# Altium PCB linkit-v4-0.3_6layers_smdonly.PcbDoc (part 3 of 5)
Units mm, origin at the board's own origin, x right, y up, seen from the top; angles counter-clockwise.
Board outline 70 x 35 mm, 6 copper layers (Top Layer, Int1 (GND), Int2 (Sign), Int3 (Sign), Int4 (PWR), Bottom Layer), stack 1.636 mm thick; 199 components, 156 nets, 686 pads, 897 vias.
Unrouted connection lines stored in the file: 1.
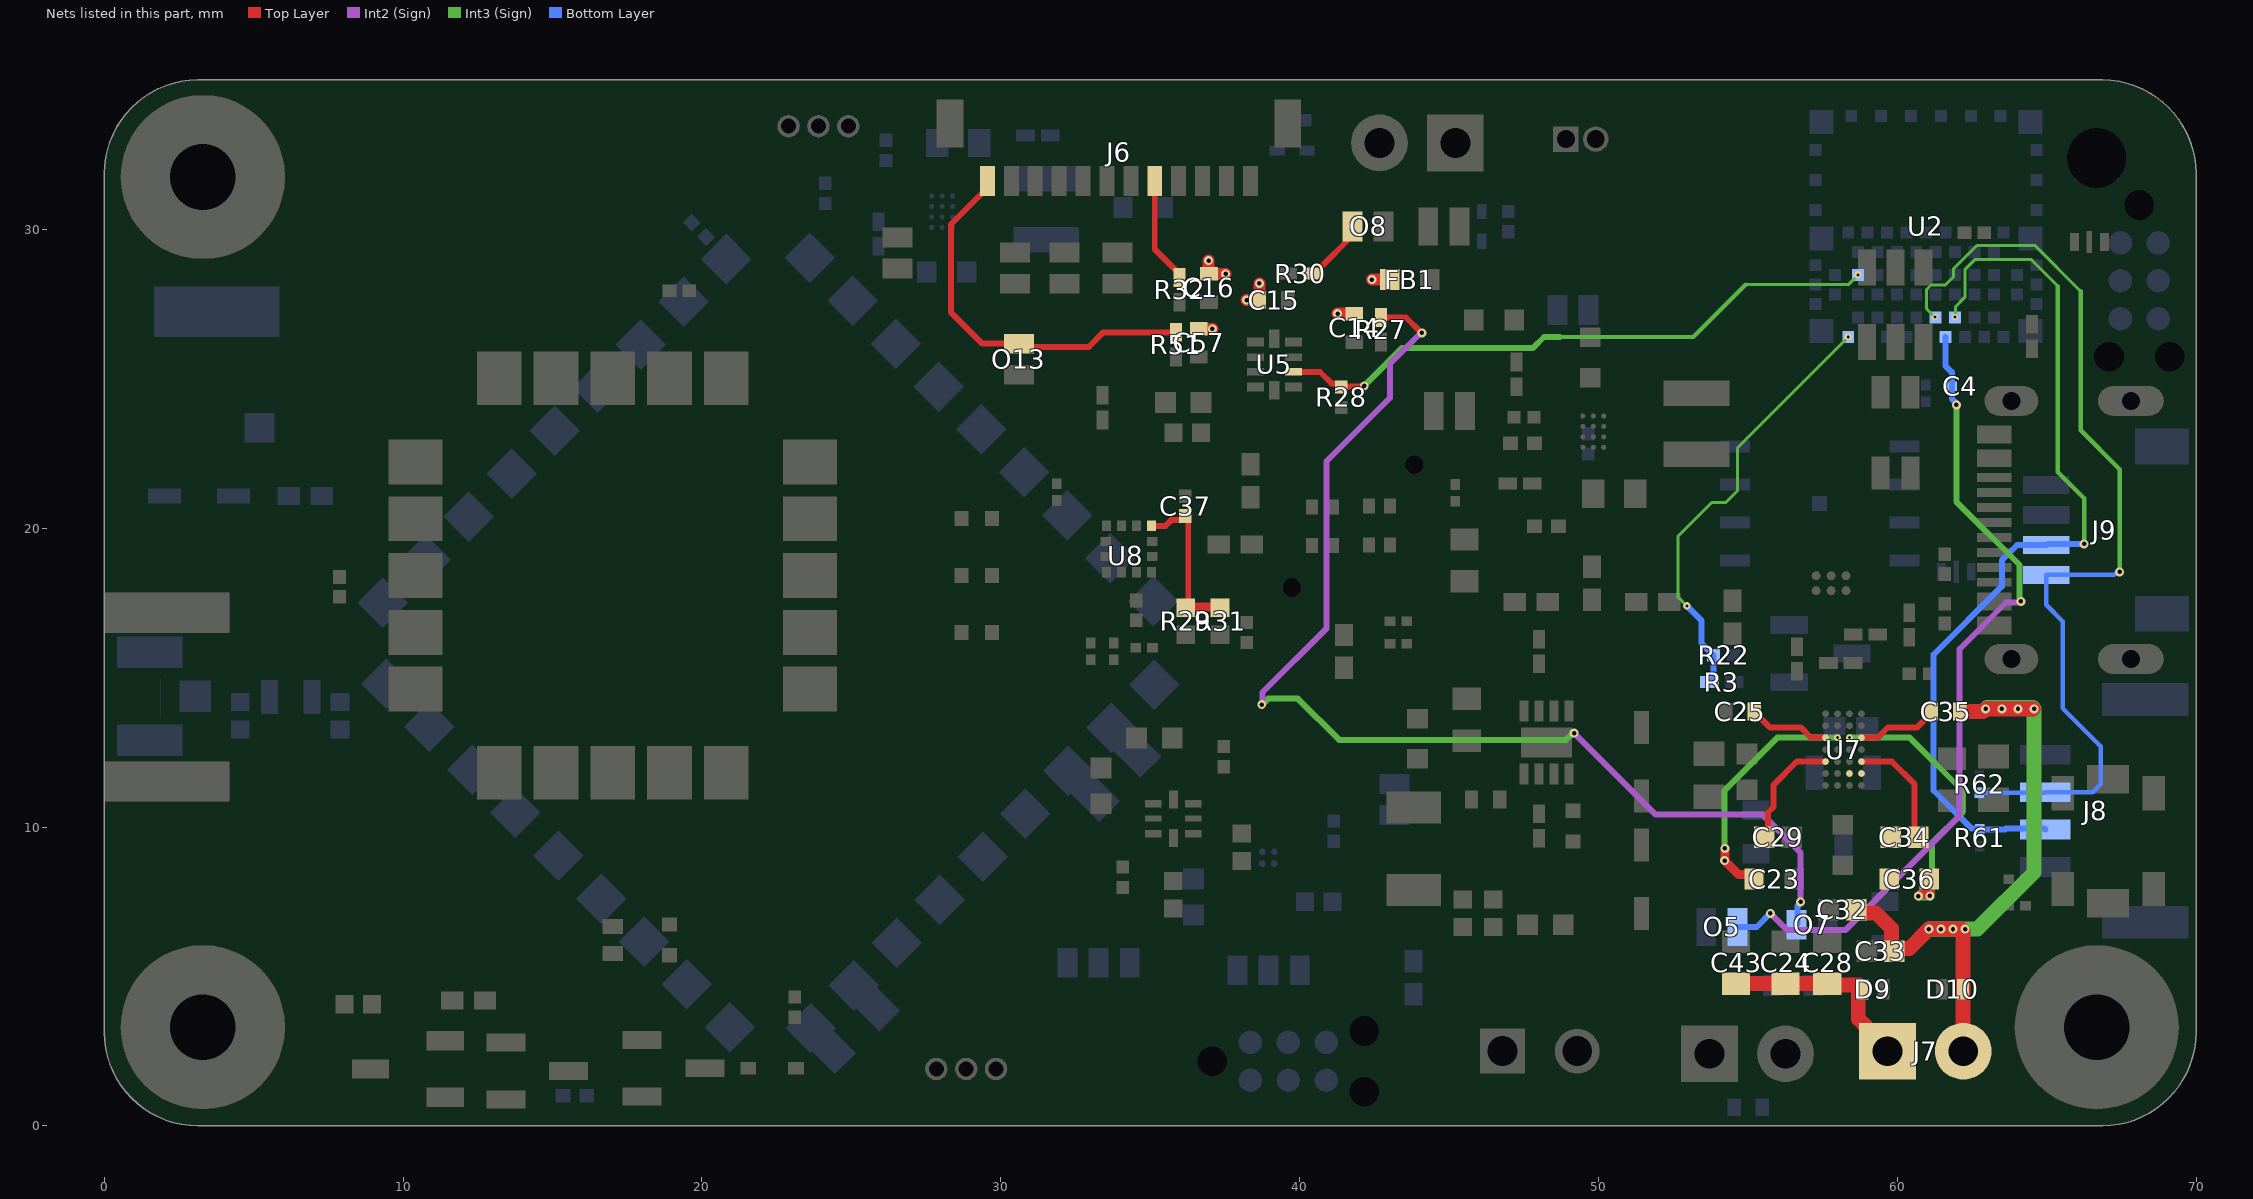
[diagram p6: the nets of this part, all layers, seen from the top]

## Part data (continued)
R18 R19 R20 R21 R22 R28 R57 R59 R60 R66 R67: "Thick Film Resistors - SMD 1 MOhms 50 mW 0201 1%", Manufacturer_Name=KEMET, Mouser Part Number=603-RC0201FR-7D1ML, Arrow Part Number=RC0201FR-7D1ML, Arrow Price/Stock=https://www.arrow.com/en/products/rc0201fr-7d1ml/yageo, Datasheet Link=http://www.yageo.com/documents/recent/PYu-RC0201_51_RoHS_L_8.pdf, Height=0.26mm, Manufacturer_Part_Number=RC0201FR-7D1ML, Mouser Price/Stock=https://www.mouser.co.uk/ProductDetail/YAGEO/RC0201FR-7D1ML?qs=NgbZBzc1CyEo5FlGf5N0Ug%3D%3D
R23: library part "RES 750R 0201 1% 100PPM", "RES 750R 0201 1% 100PPM", Supplier Part Number 1=71-CRCW0201750RFKED, TOLERANCE=1%, PPM=100, Size=0201, Supplier 1=Mouser, Supplier 2=Digi-Key, Supplier Part Number 2=541-750AABCT-ND
R24: library part "RES 330R 0201 1% 100PPM", "RES 330R 0201 1% 100PPM", Supplier Part Number 1=71-CRCW0201330RFKED, TOLERANCE=1%, PPM=100, Size=0201, Supplier 1=Mouser, Supplier 2=Digi-Key, Supplier Part Number 2=541-330AABCT-ND
R25: library part "RES 1.6K 0201 1% 100PPM", "RES 1.6K 0201 1% 100PPM", Supplier Part Number 1=71-CRCW02011K60FKED, TOLERANCE=1%, PPM=100, Size=0201, Supplier 1=Mouser, Supplier 2=Digi-Key, Supplier Part Number 2=541-1.60KAABCT-ND
R26: library part RES-NC-0402, "Generic Resistor, Not Fitted", Manufacturer=YAGEO, Manufacturer_Part_Number=RC0402JR-070RL, Package=R0402, ComponentLink1Description=Datasheet, ComponentLink1URL=http://tunmcdsvn.tun.st.com/Component_Datasheet_Library/Trunk/Resistors/Yageo_Resistor_RC0402-series, Initial_Board_Reference=MB1274, Internal_Part_Number=MCD-00052, part_type=Resistor, Provided_By=SUBCO, status=Released
R31: library part "RES 0R 0402", "RES 0R 0402", Supplier Part Number 1=603-RC0402JR-070RL, Size=0402, Supplier 1=Mouser, Supplier 2=Digi-Key, Supplier Part Number 2=311-0.0JRCT-ND
R33 R34: "Thick Film Resistors - SMD 1/20watt 5.1Kohms 5% 200ppm", Manufacturer_Name=Vishay, Mouser Part Number=71-CRCW02015K10JNED, Datasheet Link=http://www.vishay.com/docs/20035/dcrcwe3.pdf, Height=0.28mm, Manufacturer_Part_Number=CRCW02015K10JNED, Mouser Price/Stock=https://www.mouser.com/Search/Refine.aspx?Keyword=71-CRCW02015K10JNED
R35: library part CRCW04020000Z0EEHP, "Thick Film Resistors - SMD CRCW 402 jumper", Manufacturer_Name=Vishay, Mouser Part Number=71-CRCW04020000Z0EEH, Arrow Part Number=CRCW04020000Z0EEHP, Arrow Price/Stock=https://www.arrow.com/en/products/crcw04020000z0eehp/vishay?utm_currency=USD&region=nac, Datasheet Link=http://www.vishay.com/docs/20035/dcrcwe3.pdf, Height=0.4mm, Manufacturer_Part_Number=CRCW04020000Z0EEHP, Mouser Price/Stock=https://www.mouser.co.uk/ProductDetail/Vishay-Dale/CRCW04020000Z0EEHP?qs=Imq1NPwxi74NTc567q7flQ%3D%3D
R36: "Res Thick Film 0201 453 Ohm 1% 1/20W ±100ppm/°C Molded SMD SMD Paper T/R", Case Code (Imperial)=0201, Case Code (Metric)=0603, Manufacturer="Vishay Dale", Manufacturer Part Number=CRCW0201453RFKED, Manufacturer_Name=Vishay, Max Operating Temperature=155°C, Max Power Dissipation=50mW, Min Operating Temperature=-55°C, Mouser Part Number=71-CRCW020120K0FKED, Package Quantity=10000, Supplier Part Number=71-CRCW0201453RFKED, Temperature Coefficient=100ppm/°C, TOLERANCE=1%, Voltage Rating=30V, Arrow Part Number=CRCW020120K0FKED, Arrow Price/Stock=https://www.arrow.com/en/products/crcw020120k0fked/vishay, Case/Package=0201, Category="Chip SMD Resistors", ComponentLink1Description=https://datasheet.ciiva.com/8935/crcw0201e3-8935846.pdf?src-supplier=Avnet, ComponentLink1URL=https://datasheet.ciiva.com/8935/crcw0201e3-8935846.pdf?src-supplier=Avnet, ComponentLink2Description=https://datasheet.ciiva.com/2580/crcw0201e3-2580478.pdf?src-supplier=Digikey, ComponentLink2URL=https://datasheet.ciiva.com/2580/crcw0201e3-2580478.pdf?src-supplier=Digikey, Contact Plating=Tin, Datasheet Link=http://www.vishay.com/docs/20035/dcrcwe3.pdf, Height=0.28mm, Lead Free="Lead Free", Length=0.024inch, Manufacturer_Part_Number=CRCW020120K0FKED, Mouser Price/Stock=https://www.mouser.co.uk/ProductDetail/Vishay-Dale/CRCW020120K0FKED?qs=1%252BOKmYoxJmkUY7PW7c9G2g%3D%3D, Number of Terminations=2, Packaging="Tape and Reel", Power Rating=50mW, Pricing="1=0,21, 10=0,091, 50=0,091, 100=0,063, 1000=0,043, 10000=0,029 (USD)", Radiation Hardening=No, RoHS=Yes, RoHS Compliant=Yes, Series=CRCW, Stock=8250, SUPPLIER=Mouser, Termination=SMD/SMT, Voltage Rating (DC)=30V, Weight=6E-06oz, Width=0.3mm
R37: "Thick Film Resistors - SMD 10 kOhms 50 mW 0201 1%", Manufacturer_Name=KEMET, Mouser Part Number=603-RC0201FR-7D10KL, Datasheet Link=http://www.yageo.com/documents/recent/PYu-RC0201_51_RoHS_L_8.pdf, Height=0.26mm, Manufacturer_Part_Number=RC0201FR-7D10KL, Mouser Price/Stock=https://www.mouser.co.uk/ProductDetail/YAGEO/RC0201FR-7D10KL?qs=F5EMLAvA7ICAEt2%2Fo%2FBSlA%3D%3D
R38: "Thick Film Resistors - SMD 0201 255ohm 1% HalogenFree AEC-Q200", Manufacturer_Name=Panasonic, Datasheet Link=https://industrial.panasonic.com/cdbs/www-data/pdf/RDA0000/AOA0000C301.pdf, Height=0.26mm, Manufacturer_Part_Number=ERJ-1GNF2550C
R39: "Thick Film Resistors - SMD 1/20watt 196ohms 1% 100ppm"
R40 R42: "Thick Film Resistors - SMD 1/20watt 470ohms 1% 200ppm", Manufacturer_Name=Panasonic, Mouser Part Number=667-ERJ-U02F4700X, Datasheet Link=https://industrial.panasonic.com/cdbs/www-data/pdf/RDP0000/AOA0000C334.pdf, Height=0.4mm, Manufacturer_Part_Number=ERJ-U02F4700X, Mouser Price/Stock=https://www.mouser.co.uk/ProductDetail/Panasonic/ERJ-U02F4700X?qs=CBysBIMljtjEviQOZxHkmQ%3D%3D
R41: "Thick Film Resistors - SMD 1/16watt 3.3Kohms 1% 100ppm", Manufacturer_Name=Vishay, Mouser Part Number=71-CRCW0402-3.3K-E3, Arrow Part Number=CRCW04023K30FKED, Arrow Price/Stock=https://www.arrow.com/en/products/crcw04023k30fked/vishay, Datasheet Link=http://www.vishay.com/docs/20035/dcrcwe3.pdf, Height=0.4mm, Manufacturer_Part_Number=CRCW04023K30FKED, Mouser Price/Stock=https://www.mouser.co.uk/ProductDetail/Vishay-Dale/CRCW04023K30FKED?qs=iv%252Be0Bc5VY2uvlCcTQHBWQ%3D%3D
R43 R44: "Thick Film Resistors - SMD 1/20watt 22ohms 1% 200ppm", Manufacturer_Name=Panasonic, Datasheet Link=https://industrial.panasonic.com/cdbs/www-data/pdf/RDP0000/AOA0000C334.pdf, Height=0.4mm, Manufacturer_Part_Number=ERJ-U02F22R0X
R45 R68: "Thick Film Resistors - SMD 36.5Kohm 1% 200ppm", Manufacturer_Name=Vishay, Datasheet Link=http://www.vishay.com/docs/20035/dcrcwe3.pdf, Height=0.28mm, Manufacturer_Part_Number=CRCW020136K5FNED
R46 R69: "Thick Film Resistors - SMD 0 Ohms 50mW 0201 1%", Manufacturer_Name=KEMET, Mouser Part Number=603-RC0201FR-070RL, Arrow Part Number=RC0201FR-070RL, Arrow Price/Stock=https://www.arrow.com/en/products/rc0201fr-070rl/yageo?region=nac, Datasheet Link=http://www.yageo.com/documents/recent/PYu-RC0201_51_RoHS_L_8.pdf, Height=0.26mm, Manufacturer_Part_Number=RC0201FR-070RL, Mouser Price/Stock=https://www.mouser.co.uk/ProductDetail/YAGEO/RC0201FR-070RL?qs=LWWr1WFOkdETHfAClQk8Xg%3D%3D
R47 R70: "Thick Film Resistors - SMD 1/20W 2.74Kohms 1% 200ppm", Manufacturer_Name=Vishay, Datasheet Link=http://www.vishay.com/docs/20035/dcrcwe3.pdf, Height=0.28mm, Manufacturer_Part_Number=CRCW02012K74FNED
R49: "Thick Film Resistors - SMD 1/16watt 49.9Kohms 1%", Manufacturer_Name=Vishay, Mouser Part Number=71-CRCW0402-49.9K-E3, Arrow Part Number=CRCW040249K9FKED, Arrow Price/Stock=https://www.arrow.com/en/products/crcw040249k9fked/vishay?region=nac, Datasheet Link=http://www.vishay.com/docs/20035/dcrcwe3.pdf, Height=0.4mm, Manufacturer_Part_Number=CRCW040249K9FKED, Mouser Price/Stock=https://www.mouser.co.uk/ProductDetail/Vishay-Dale/CRCW040249K9FKED?qs=hAuyw6LW%252BLhwjtjsHx%2FGDQ%3D%3D
R52 R53 R55: "Thick Film Resistors - SMD CRCW 402 jumper", Manufacturer_Name=Vishay, Mouser Part Number=71-CRCW04020000Z0EEH, Arrow Part Number=CRCW04020000Z0EEHP, Arrow Price/Stock=https://www.arrow.com/en/products/crcw04020000z0eehp/vishay?utm_currency=USD&region=nac, Datasheet Link=http://www.vishay.com/docs/20035/dcrcwe3.pdf, Height=0.4mm, Manufacturer_Part_Number=CRCW04020000Z0EEHP, Mouser Price/Stock=https://www.mouser.co.uk/ProductDetail/Vishay-Dale/CRCW04020000Z0EEHP?qs=Imq1NPwxi74NTc567q7flQ%3D%3D
R58: "Thick Film Resistors - SMD 10 MOhms 50mW 0201 1%", Manufacturer_Name=KEMET, Mouser Part Number=603-RC0201FR-0710ML, Arrow Part Number=RC0201FR-0710ML, Arrow Price/Stock=https://www.arrow.com/en/products/rc0201fr-0710ml/yageo, Datasheet Link=http://www.yageo.com/documents/recent/PYu-RC0201_51_RoHS_L_8.pdf, Height=0.26mm, Manufacturer_Part_Number=RC0201FR-0710ML, Mouser Price/Stock=https://www.mouser.com/Search/Refine.aspx?Keyword=603-RC0201FR-0710ML
R63: "Thick Film Resistors - SMD 1/20watt 100Kohms 5% 200ppm", Manufacturer_Name=Vishay, Mouser Part Number=71-CRCW0201100KJNED, Arrow Part Number=CRCW0201100KJNED, Arrow Price/Stock=https://www.arrow.com/en/products/crcw0201100kjned/vishay, Datasheet Link=http://www.vishay.com/docs/20035/dcrcwe3.pdf, Height=0.28mm, Manufacturer_Part_Number=CRCW0201100KJNED, Mouser Price/Stock=https://www.mouser.co.uk/ProductDetail/Vishay-Dale/CRCW0201100KJNED?qs=IQLUlsvFoXu8A8gHIw6owA%3D%3D
R65: library part CRCW04020000Z0ED, "Thick Film Resistors  - SMD 0402 0.063 W 0 Ohm Jumper", Case Code (Imperial)=0402, Case Code (Metric)=1005, Manufacturer 1=Vishay, Max Operating Temperature=155°C, Max Power Dissipation=63mW, Min Operating Temperature=-55°C, Package Quantity=10000, Ratings=AEC-Q200, Resistance=0mR, Resistor Type="Thick Film", Supplier Part Number 1=541-0.0JCT-ND, Temperature Coefficient=100ppm/°C, TOLERANCE=5%, Voltage Rating=50V, Case/Package=0402, Category 1="Chip SMD Resistors", ComponentLink1Description=https://datasheet.ciiva.com/3255/dcrcwe3-3255944.pdf?src-supplier=Avnet, ComponentLink1URL=https://datasheet.ciiva.com/3255/dcrcwe3-3255944.pdf?src-supplier=Avnet, ComponentLink2Description=https://datasheet.ciiva.com/3255/dcrcwe3-3255945.pdf?src-supplier=Avnet, ComponentLink2URL=https://datasheet.ciiva.com/3255/dcrcwe3-3255945.pdf?src-supplier=Avnet, ComponentLink3Description=https://datasheet.ciiva.com/2461/dcrcwe3-2461962.pdf?src-supplier=Digi-Key, ComponentLink3URL=https://datasheet.ciiva.com/2461/dcrcwe3-2461962.pdf?src-supplier=Digi-Key, ComponentLink4Description=https://datasheet.ciiva.com/7841/1720486-7841802.pdf?src-supplier=Element14, ComponentLink4URL=https://datasheet.ciiva.com/7841/1720486-7841802.pdf?src-supplier=Element14, ComponentLink5Description=https://datasheet.ciiva.com/2461/dcrcwe3-2461964.pdf?src-supplier=Digi-Key, ComponentLink5URL=https://datasheet.ciiva.com/2461/dcrcwe3-2461964.pdf?src-supplier=Digi-Key, ComponentLink6Description=https://datasheet.ciiva.com/7841/1697337-7841468.pdf?src-supplier=Element14, ComponentLink6URL=https://datasheet.ciiva.com/7841/1697337-7841468.pdf?src-supplier=Element14, ComponentLink7Description=https://datasheet.ciiva.com/16761/70200976-16761309.pdf?src-supplier=Allied+Electronics, ComponentLink7URL=https://datasheet.ciiva.com/16761/70200976-16761309.pdf?src-supplier=Allied+Electronics, ComponentLink8Description=https://datasheet.ciiva.com/26311/fld-crcw-e3-data-en-26311550.pdf?src-supplier=Distrelec, ComponentLink8URL=https://datasheet.ciiva.com/26311/fld-crcw-e3-data-en-26311550.pdf?src-supplier=Distrelec, Construction=Rectangular, Contact Plating=Tin, Depth=0.5mm, Description 1="CRCW Series 0402 0.063 W 0 Ohm Jumper Surface Mount Thick Film Chip Resistor", Features="Automotive AEC-Q200", Height=0.35mm, Lead Free="Lead Free", Length=1mm, Manufacturer Part Number 1=CRCW04020000Z0ED, Military Standard=Not, Number of Terminations=2, Packaging="Tape and Reel", Power Rating=63mW, Pricing 1="1=0,1, 10=0,029, 25=0,0208, 50=0,016, 100=0,0118, 250=0,009, 500=0,0072, 1000=0,0053, 5000=0,0038 (USD)", Radiation Hardening=No, Reach SVHC Compliant=Unknown, RoHS 1=Yes, RoHS Compliant=Yes, Series=CRCW, Size Code=0402, Stock 1=170588, Supplier 1=Digi-Key, Termination=SMD/SMT, Voltage Rating (DC)=50V, Weight=2.3E-05oz, Width=0.5mm
SW1: "Board Mount Hall Effect/Magnetic Sensors Integrated Digital Omnipolar, TMR, High Sensitivity Magnetic Switch, SOT23 Package, Ind Temp, 2Hz", Manufacturer_Name="Allegro MicroSystems", Mouser Part Number=462-CT8132BV-IS3, Datasheet Link=https://www.mouser.fr/datasheet/2/1115/Allegro_DS_CT813x_Datasheet_GS_FINAL_R2_v2-3441103.pdf, Height=1.4mm, Manufacturer_Part_Number=CT8132BV-IS3, Mouser Price/Stock=https://www.mouser.fr/ProductDetail/Allegro-MicroSystems/CT8132BV-IS3?qs=GBLSl2Akirsc7cUAudCqXg%3D%3D
SW2: "SW SPST PB 50MA 12V SMT CK variant", Manufacturer=C&K, Manufacturers Part Number="PTS820J2xM SMTR LFS", Supplier Part Number 1=611-PTS820J25MSMTR, Distributor 1=EBV, Distributor 2="Future Electronics", Supplier 1=Mouser, Supplier 2=Digi-Key, Supplier Part Number 2=CKN10505CT-ND
TP14 TP15 TP16 TP17: library part TestPoint-compact, "Test Point, Compact, SMT", Manufacturer=Keystone, PartNumber=5016, Supplier Part Number 1=36-5016TR-ND, CNHeader=FALSE, ComponentLink1Description="Datasheet URL", ComponentLink1URL=http://www.keyelco.com/userAssets/store/files/5016.PDF, CompType="Test Point", CT=TRUE, Green_EU RoHS=Passed, Green_EU RoHS-2=Incomplete, Green_Lifecycle=Active, Green_REACh=Passed, LatestRevisionDate=26/05/2017, MountType=SMT, PackageReference=Testpoint_Keystone_Compact, Publisher="Texas Instruments", RoHS=Y, Supplier 1=Digi-Key, Supplier 2=Mouser, Supplier Part Number 2=534-5016
U1: "Battery Management 800-mA linear batter y charger for one-ce", Manufacturer_Name="Texas Instruments", Mouser Part Number=595-BQ25176MDSGR, Arrow Part Number=BQ25176MDSGR, Arrow Price/Stock=https://www.arrow.com/en/products/bq25176mdsgr/texas-instruments?region=nac, Datasheet Link=https://www.ti.com/lit/gpn/bq25176m, Height=0.8mm, Manufacturer_Part_Number=BQ25176MDSGR, Mouser Price/Stock=https://www.mouser.co.uk/ProductDetail/Texas-Instruments/BQ25176MDSGR?qs=Y0Uzf4wQF3nVhcdITj52nA%3D%3D
U2: "IC ISP Smart Bluetooth Module", Manufacturer=InsightSIP, Manufacturers Part Number=ISP1807-LR-ST, Temp Max=85, Temp Min=-40, Supplier 1=Rutronik, Supplier 2=Mouser, Supplier Part Number 1=ISP1807-LR-ST, Supplier Part Number 2=359-ISP1807-LR-ST, Supplier Unit Price 1=8.5
U3: "IC MEM SERIAL NOR FLASH QSPI 128Mb/16MB 3.6V 166MHz WSON8 6X5", Manufacturer=ISSI, Supplier Part Number 1=2901145, Temp Max=105, Temp Min=-40, Distributor 1=EBV, Distributor 2="Future Electronics", Manufacturers Part Number=IS25LP128F-JKLE, Supplier 1=Farnell, Supplier 2=Mouser, Supplier Part Number 2=870-IS25LP128FJKLETR
U4: "Power Switch ICs - Power Distribution Low Input VTG Dual L oad Switch", Manufacturer_Name="Texas Instruments", Mouser Part Number=595-TPS22960RSER, Arrow Part Number=TPS22960RSER, Arrow Price/Stock=https://www.arrow.com/en/products/tps22960rser/texas-instruments?region=nac, Datasheet Link=https://www.ti.com/lit/ds/symlink/tps22960.pdf?ts=1638681846865&ref_url=https%253A%252F%252Fwww.google.com%252F, Height=0.6mm, Manufacturer_Part_Number=TPS22960RSER, Mouser Price/Stock=https://www.mouser.co.uk/ProductDetail/Texas-Instruments/TPS22960RSER?qs=EQxOuqCyzqQpKHLEcq5RSg%3D%3D
U5: "Analog to Digital Converters - ADC 16B ADC w/ Int MUX P GA Comp Osc & Ref A", Manufacturer_Name="Texas Instruments", Mouser Part Number=595-ADS1115IRUGR, Arrow Part Number=ADS1115IRUGR, Arrow Price/Stock=https://www.arrow.com/en/products/ads1115irugr/texas-instruments?utm_currency=USD&region=nac, Datasheet Link=https://www.ti.com/lit/ds/symlink/ads1115.pdf?ts=1601235703022&ref_url=https%253A%252F%252Fwww.ti.com%252Fproduct%252FADS1115%253FkeyMatch%253DADS1115IRUGR%2526tisearch%253DSearch-EN-everything%2526usecase%253DOPN, Height=0.4mm, Manufacturer_Part_Number=ADS1115IRUGR, Mouser Price/Stock=https://www.mouser.co.uk/ProductDetail/Texas-Instruments/ADS1115IRUGR?qs=IK5e5L0zOXhqw%2F8AHSSbuA%3D%3D
U6: "ESD Suppressors / TVS Diodes High Speed Interface Protection Low Cap", Manufacturer_Name=STMicroelectronics, Mouser Part Number=511-USBLC6-2SC6, Arrow Part Number=USBLC6-2SC6, Arrow Price/Stock=https://www.arrow.com/en/products/usblc6-2sc6/stmicroelectronics?utm_currency=USD&region=europe, Datasheet Link=http://www.st.com/st-web-ui/static/active/en/resource/technical/document/datasheet/CD00050750.pdf, Height=1.45mm, Manufacturer_Part_Number=USBLC6-2SC6, Mouser Price/Stock=https://www.mouser.co.uk/ProductDetail/STMicroelectronics/USBLC6-2SC6?qs=po45yt2pPpu%2FhNIlwQdTlg%3D%3D
U7: "Wireless Charging ICs Wireless Pwr Receivr A 595-BQ51003YFPR", Manufacturer_Name="Texas Instruments", Mouser Part Number=595-BQ51003YFPT, Arrow Part Number=BQ51003YFPT, Arrow Price/Stock=https://www.arrow.com/en/products/bq51003yfpt/texas-instruments?region=nac, Datasheet Link=http://www.ti.com/lit/gpn/BQ51003, Height=0.5mm, Manufacturer_Part_Number=BQ51003YFPT, Mouser Price/Stock=https://www.mouser.co.uk/ProductDetail/Texas-Instruments/BQ51003YFPT?qs=QCUnHQQYO1rX6GZ4rUhwCg%3D%3D
U8: "IC AXL Accel/temp SPI/I2C 12LGA", Manufacturer="Bosch Sensortec", Supplier Part Number 1=828-1081-1-ND, Temp Max=85, Temp Min=-40, Manufacturers Part Number=BMA400, Supplier 1=Digi-Key, Supplier 2=Mouser, Supplier Part Number 2=262-BMA400
U9: "GNSS / GPS Modules u-blox M10 GNSS antenna module ROM, TCXO, SAW, LNA LGA, 16x16 mm", Manufacturer_Name=U-Blox, Mouser Part Number=377-SAM-M10Q-00B, Datasheet Link=https://content.u-blox.com/sites/default/files/documents/SAM-M10Q_DataSheet_UBX-22013293.pdf, Height=6.8mm, Manufacturer_Part_Number=SAM-M10Q-00B, Mouser Price/Stock=https://www.mouser.co.uk/ProductDetail/u-blox/SAM-M10Q-00B?qs=vvQtp7zwQdOaA6LplTUKjg%3D%3D
U10 U13: "Switching Voltage Regulators 5.5-V buck-boost con verter with 75-nA op", Manufacturer_Name="Texas Instruments", Mouser Part Number=595-TPS63901YCJR, Arrow Part Number=TPS63901YCJR, Arrow Price/Stock=https://www.arrow.com/en/products/tps63901ycjr/texas-instruments?region=nac, Datasheet Link=https://www.ti.com/lit/ds/symlink/tps63901.pdf?ts=1658737279065&ref_url=https%253A%252F%252Fwww.ti.com%252Fproduct%252FTPS63901%253FkeyMatch%253DTPS63901YCJR%2526tisearch%253Dsearch-everything%2526usecase%253DOPN, Height=0.35mm, Manufacturer_Part_Number=TPS63901YCJR, Mouser Price/Stock=https://www.mouser.co.uk/ProductDetail/Texas-Instruments/TPS63901YCJR?qs=vvQtp7zwQdNZy3FE2e2hqg%3D%3D
U11: "Power Switch ICs - Power Distribution 5.5-V 2-A 60-mohm 10-nA leakage load A 595-TPS22916CNYFPT", Manufacturer_Name="Texas Instruments", Mouser Part Number=595-TPS22916BYFPR, Arrow Part Number=TPS22916BYFPR, Arrow Price/Stock=https://www.arrow.com/en/products/tps22916byfpr/texas-instruments?region=europe, Datasheet Link=http://www.ti.com/lit/gpn/tps22916, Height=0.5mm, Manufacturer_Part_Number=TPS22916BYFPR, Mouser Price/Stock=https://www.mouser.co.uk/ProductDetail/Texas-Instruments/TPS22916BYFPR?qs=EU6FO9ffTwcHQneHYjMKrg%3D%3D
U12: "Arribada SMD module Argos comunication with PA GR5504"

## Via types
v1: diameter 0.4, hole 0.2, Int1 (GND) to Bottom Layer, tented both sides, 151 vias
v2: diameter 0.4, hole 0.2, Int1 (GND) to Int2 (Sign), tented both sides, 105 vias
v3: diameter 0.3, hole 0.15, Top Layer to Int1 (GND), tented both sides, 97 vias
v4: diameter 0.4, hole 0.2, Int1 (GND) to Int3 (Sign), tented both sides, 78 vias
v5: diameter 0.4, hole 0.2, Top Layer to Int1 (GND), tented both sides, 64 vias
v6: diameter 0.3, hole 0.15, Top Layer to Int4 (PWR), tented both sides, 63 vias
v7: diameter 0.3, hole 0.15, Top Layer to Int3 (Sign), tented both sides, 57 vias
v8: diameter 0.3, hole 0.15, Int1 (GND) to Bottom Layer, tented both sides, 50 vias
v9: diameter 0.4, hole 0.2, Top Layer to Bottom Layer, tented both sides, 40 vias
v10: diameter 0.3, hole 0.15, Int4 (PWR) to Bottom Layer, tented both sides, 17 vias
v11: diameter 0.3, hole 0.15, Int3 (Sign) to Bottom Layer, tented both sides, 17 vias
v12: diameter 0.3, hole 0.15, Top Layer to Int2 (Sign), tented both sides, 16 vias
v13: diameter 0.3, hole 0.15, Int2 (Sign) to Bottom Layer, tented both sides, 15 vias
v14: diameter 0.2, hole 0.1, Int3 (Sign) to Bottom Layer, tented both sides, 14 vias
v15: diameter 0.3, hole 0.15, Int1 (GND) to Int2 (Sign), tented both sides, 14 vias
v16: diameter 0.6, hole 0.15, Int1 (GND) to Bottom Layer, tented both sides, 13 vias
v17: diameter 0.5, hole 0.2, Top Layer to Bottom Layer, tented both sides, 12 vias
v18: diameter 0.2, hole 0.1, Int2 (Sign) to Bottom Layer, tented both sides, 11 vias
v19: diameter 0.3, hole 0.15, Int2 (Sign) to Int3 (Sign), tented both sides, 9 vias
v20: diameter 0.3, hole 0.15, Int1 (GND) to Int3 (Sign), tented both sides, 8 vias
v21: diameter 0.226, hole 0.1, Top Layer to Int3 (Sign), tented both sides, 6 vias
v22: diameter 0.25, hole 0.1, Int3 (Sign) to Bottom Layer, tented both sides, 5 vias
v23: diameter 0.3, hole 0.15, Top Layer to Bottom Layer, tented both sides, 5 vias
v24: diameter 0.25, hole 0.1, Int2 (Sign) to Bottom Layer, tented both sides, 5 vias
v25: diameter 0.25, hole 0.1, Top Layer to Bottom Layer, tented both sides, 5 vias
v26: diameter 0.2, hole 0.1, Top Layer to Bottom Layer, tented both sides, 3 vias
v27: diameter 0.6, hole 0.3, Top Layer to Bottom Layer, tented both sides, 3 vias
v28: diameter 0.6, hole 0.15, Top Layer to Int2 (Sign), tented both sides, 2 vias
v29: diameter 0.6, hole 0.15, Int3 (Sign) to Bottom Layer, tented both sides, 2 vias
v30: diameter 0.25, hole 0.1, Int1 (GND) to Bottom Layer, tented both sides, 2 vias
v31: diameter 0.2, hole 0.1, Int1 (GND) to Bottom Layer, tented both sides, 2 vias
v32: diameter 0.4, hole 0.2, Int2 (Sign) to Bottom Layer, tented both sides, 1 vias
v33: diameter 0.4, hole 0.2, Top Layer to Int2 (Sign), tented both sides, 1 vias
v34: diameter 0.169, hole 0.1, Int3 (Sign) to Bottom Layer, tented both sides, 1 vias
v35: diameter 0.6, hole 0.15, Int4 (PWR) to Bottom Layer, tented both sides, 1 vias
v36: diameter 0.25, hole 0.1, Int2 (Sign) to Int3 (Sign), tented both sides, 1 vias
v37: diameter 0.169, hole 0.1, Top Layer to Int2 (Sign), tented both sides, 1 vias

## Nets (pads, with @x,y where several pads share a name; then routed paths per layer and width w, separated by ;. In a path a pad name is that pad's centre, name@x,y a point inside that pad or via, vN(x,y) a via of type N, cw(c..) or ccw(c..) an arc to the next point about the centre after c; other vN are vias at no path point)
ADC0: O7.2 R27.1 | length 39.2
  Top Layer w0.2: R27.1@42.718,27.052 43.56,27.052 44.077,26.535 v12(44.09,26.535)
  Int2 (Sign) w0.2: v19(38.735,14.097) 38.754,14.116 38.754,14.5 40.894,16.64 40.894,22.232 43.019,24.357 43.019,25.493 44.061,26.535 v12(44.09,26.535) ; v19(49.19,13.144) 51.92,10.414 55.497,10.414 56.769,9.142 v13(56.769,7.493)
  Int3 (Sign) w0.2: v19(38.735,14.097) 38.75,14.097 38.952,14.299 39.942,14.299 41.322,12.919 48.911,12.919 49.136,13.144 v19(49.19,13.144)
  Bottom Layer w0.2: O7.2@56.629,6.731 56.659,6.761 56.659,7.356 56.769,7.466 v13(56.769,7.493)
ADC1: O8.2 R30.1 | length 2.2
  Top Layer w0.2: R30.1@40.428,28.522 40.541,28.522 40.641,28.622 40.641,28.664 41.77,29.794 O8.2@41.77,30.099
ADC2: J6.5 R32.1 | length 3.6
  Top Layer w0.2: J6.5@35.154,31.623 35.154,29.332 35.987,28.499 R32.1@35.987,28.387
ADC3: J6.12 O13.2@30.607,26.175 R51.1 | length 13.1
  Top Layer w0.2: J6.12@29.554,31.623 29.554,31.373 29.404,31.223 29.392,31.223 28.33,30.161 28.33,27.229 29.384,26.175 O13.2@30.607,26.175 30.712,26.07 32.954,26.07 33.436,26.552 R51.1@35.864,26.552
ADC_ALERT_RDY: R28.2 U2.64 U5.2 | length 20.7
  Top Layer w0.2: U5.2@39.797,25.228 40.685,25.228 41.069,24.844 41.292,24.844 R28.2@41.402,24.734 ; R28.2@41.402,24.724 R28.2@41.402,24.734 ; v7(42.164,24.765) 42.143,24.744 41.413,24.744 R28.2@41.402,24.734
  Int3 (Sign) w0.1: 54.924,28.149 58.36,28.149 v22(58.685,28.474)
  Int3 (Sign) w0.15: 48.706,26.398 53.173,26.398 54.924,28.149
  Int3 (Sign) w0.2: v7(42.164,24.765) 43.434,26.035 47.817,26.035 48.18,26.398 48.706,26.398
AGND: C14.2 C15.2 C16.2 C57.2 FB1.1 | length 3.6
  Top Layer w0.4: C57.2@36.626,26.678 36.634,26.67 v3(37.084,26.67) ; v3(36.957,28.956) 36.957,28.523 C16.2@36.967,28.513 v3(37.524,28.513) ; v3(38.227,27.633) C15.2@38.654,27.633 v3(38.654,28.194) ; v3(41.275,27.178) C14.2@41.829,27.178 ; v3(42.418,28.321) FB1.1@43.013,28.321
BAT_AN: C4.2 O5.2 U2.38 | length 27.6
  Int2 (Sign) w0.2: v13(55.753,7.112) 56.305,6.56 58.271,6.56 62.086,10.375 62.086,15.959 63.64,17.513 64.095,17.513 v19(64.133,17.551)
  Int3 (Sign) w0.2: v11(61.976,24.13) 61.976,20.886 64.095,18.767 64.095,17.589 v19(64.133,17.551)
  Bottom Layer w0.2: O5.2@54.653,6.657 55.087,6.657 55.298,6.657 v13(55.753,7.112) ; U2.38@61.61,26.399 61.61,25.436 61.824,25.222 C4.2@61.824,24.752 61.824,24.336 61.976,24.184 v11(61.976,24.13)
BAT_READ_EN: R3.2 R22.2 U2.48 | length 14.8
  Int3 (Sign) w0.1: v22(52.959,17.399) 52.655,17.703 52.655,19.722 53.794,20.861 54.262,20.861 54.65,21.249 54.65,22.689 v22(58.36,26.399)
  Bottom Layer w0.2: v22(52.959,17.399) 53.455,16.903 53.455,16.141 53.728,15.868 53.728,15.858 53.838,15.748 R22.2@53.848,15.748 53.848,14.946 53.748,14.846 R3.2@53.72,14.846
BMA_PWR: C37.2 R29.1 R31.2 U8.7 | length 5.5
  Top Layer w0.2: U8.7@35.04,20.079 35.515,20.079 35.705,20.269 36.015,20.269 36.025,20.279 36.069,20.279 C37.2@36.147,20.357 ; C37.2@36.179,20.409 36.179,20.389 36.179,20.325 36.275,20.229 36.275,17.595 36.275,17.421 R29.1@36.195,17.341
  Top Layer w0.3: R29.1@36.211,17.357 R31.2@37.322,17.357
BOOT1: C29.2@55.547,9.652 U7.C4 | length 4
  Top Layer w0.2: C29.2@55.547,9.652 55.674,9.779 55.674,10.487 55.865,10.678 55.865,11.415 56.642,12.192 U7.C4@57.601,12.192
BOOT2: C34.2 U7.C1 | length 4.1
  Top Layer w0.2: U7.C1@58.801,12.192 59.817,12.192 60.582,11.427 C34.2@60.582,9.438
CLAMP1: C23.2 U7.E3 | length 8.5
  Top Layer w0.3: v7(54.234,9.285) 54.23,9.28 54.23,8.884 v7(54.226,8.879) 54.697,8.408 55.052,8.408 C23.2@55.205,8.255
  Int3 (Sign) w0.2: v7(54.226,8.879) 54.226,11.23 55.988,12.992 v21(58.001,12.992)
CLAMP2: C36.2 U7.E2 | length 9.9
  Top Layer w0.2: C36.2@61.076,8.255 C36.2@61.09,8.241
  Top Layer w0.3: v7(60.706,7.688) 60.779,7.761 61.028,7.761 v7(61.09,7.698) 61.09,7.827 C36.2@61.09,8.241
  Int3 (Sign) w0.2: v21(58.401,12.992) 60.414,12.992 62.184,11.222 62.184,10.48 61.157,9.453 61.157,7.793 61.09,7.725 v7(61.09,7.698) ; v7(60.706,7.688) v7@60.712,7.693
  Int3 (Sign) w0.3: v7@60.708,7.69 v7@61.081,7.69
COIL-1: C24.1 C28.1 C43.1 D9.1 J7.1 | length 6.3
  Top Layer w0.5: C43.1@54.61,4.761 C24.1@56.261,4.761 C28.1@57.277,4.761 ; C28.1@57.658,4.761 57.702,4.717 D9.1@58.737,4.717 ; D9.1@58.695,4.599 58.695,3.581 58.97,3.307 58.97,3.199 J7.1@59.67,2.499
COIL-2: C32.1 C33.1 C34.1 C35.1 C36.1 D10.1 J7.2 U7.B1 U7.B2 | length 22.6
  Top Layer w0.5: C32.1@58.626,7.239 58.626,7.224 58.721,7.129 59.282,7.129 59.801,6.61 59.801,5.937 C33.1@59.896,5.842 59.912,5.826 59.912,5.853 59.991,5.932 60.401,5.932 v7(61.055,6.586) ; v7@61.18,6.594 v7@61.453,6.594 ; v7(61.46,6.586) v7(61.865,6.586) 62.142,6.586 62.193,6.535 D10.1@62.193,4.572 J7.2@62.193,2.515 ; C35.1@62.14,13.862 62.866,13.862 v7(62.96,13.956) v7(63.5,13.956) v7(64.04,13.956) v7@64.537,13.956
  Int3 (Sign) w0.5: v7(61.055,6.586) v7(61.46,6.586) 61.831,6.586 v7(61.865,6.586) 62.68,6.586 64.58,8.485 v7(64.58,13.956) 64.537,13.998 64.04,13.998 63.5,13.998 v7@63.003,13.998
  other v7: 62.27,6.586
COMM1: C25.2 U7.E4 | length 2.7
  Top Layer w0.2: C25.2@55.212,13.862 55.739,13.335 56.769,13.335 57.112,12.992 U7.E4@57.601,12.992
COMM2: C35.2 U7.E1 | length 2.7
  Top Layer w0.2: U7.E1@58.801,12.992 59.347,12.992 59.69,13.335 60.663,13.335 C35.2@61.19,13.862
EXT_SCL: J8.2 J9.4 R62.2 U2.39 | length 32
  Int3 (Sign) w0.1: v14(61.261,27.06) 60.976,27.345 60.976,27.982 61.13,28.136 61.609,28.136 61.884,28.411 61.884,28.684 62.664,29.464 64.603,29.464 66.135,27.932
  Int3 (Sign) w0.15: 66.135,27.932 66.135,23.273 67.437,21.971 v11(67.437,18.542)
  Bottom Layer w0.15: R62.2@62.738,11.15 64.936,11.15 J8.2@64.952,11.166 66.538,11.166 66.802,11.43 66.802,12.7 65.532,13.97 65.532,16.891 64.987,17.436 J9.4@64.987,18.439 67.266,18.439 67.369,18.542 v11(67.437,18.542)
EXT_SDA: J8.3 J9.3 R61.1 U2.37 | length 30.3
  Int3 (Sign) w0.1: v14@61.954,27.093 61.954,27.419 62.259,27.724 62.259,28.65 62.606,28.997 64.475,28.997 65.376,28.096
  Int3 (Sign) w0.15: v14(61.935,27.074) v14@61.954,27.093 ; 65.376,28.096 65.376,21.873 66.249,21 v11(66.249,19.478)
  Bottom Layer w0.2: J8.3@64.952,9.916 64.923,9.945 63.636,9.945 63.609,9.919 R61.1@62.759,9.919 62.733,9.945 62.492,9.945 61.214,11.223 61.214,15.769 63.5,18.055 63.5,18.923 64.008,19.431 64.979,19.431 J9.3@64.987,19.439 65.026,19.478 v11(66.249,19.478)